# EAGLE board 12_SHR (EAGLE 7.5.0)
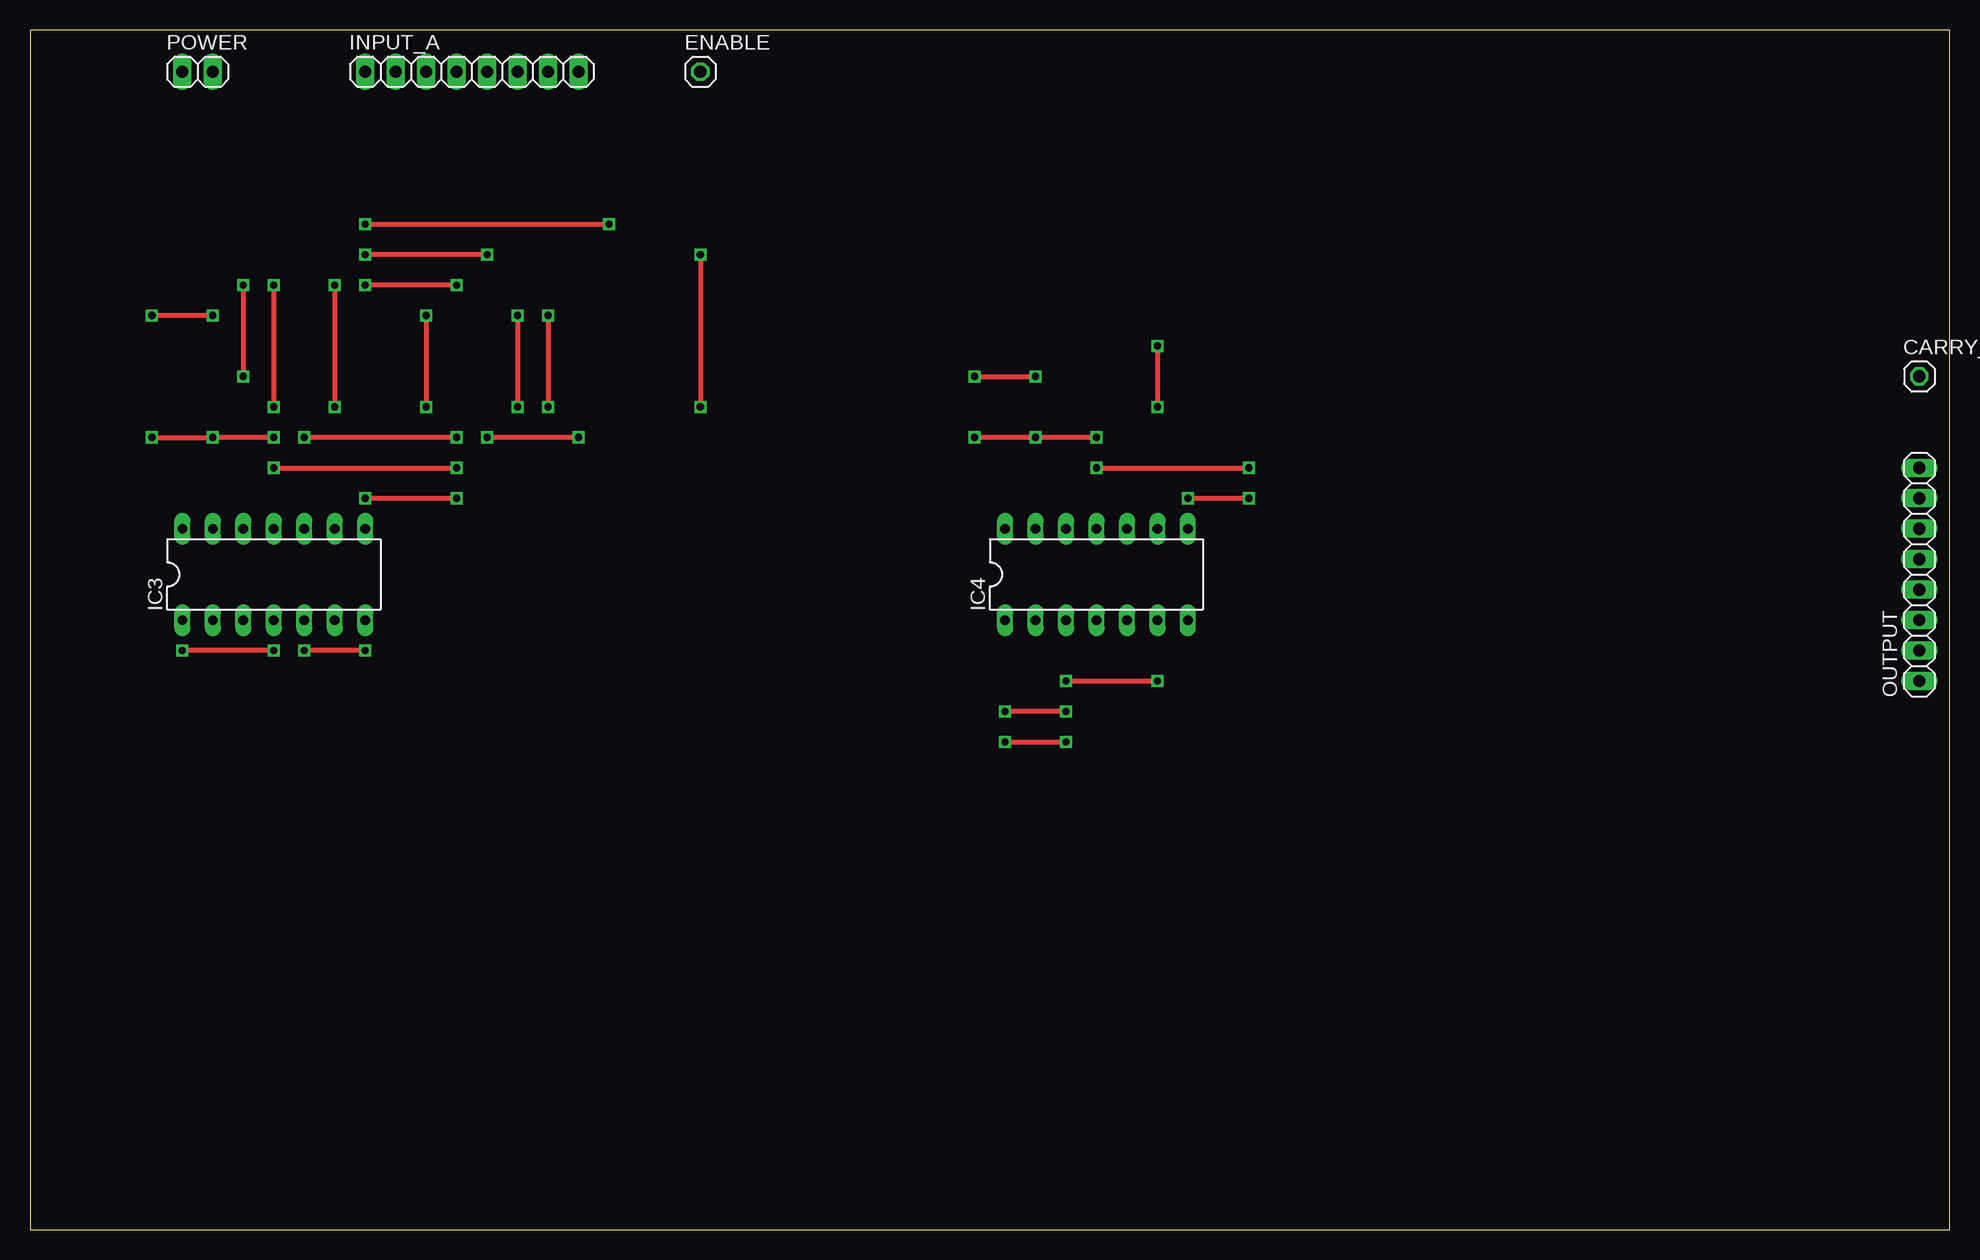
[diagram p0: board, top side]
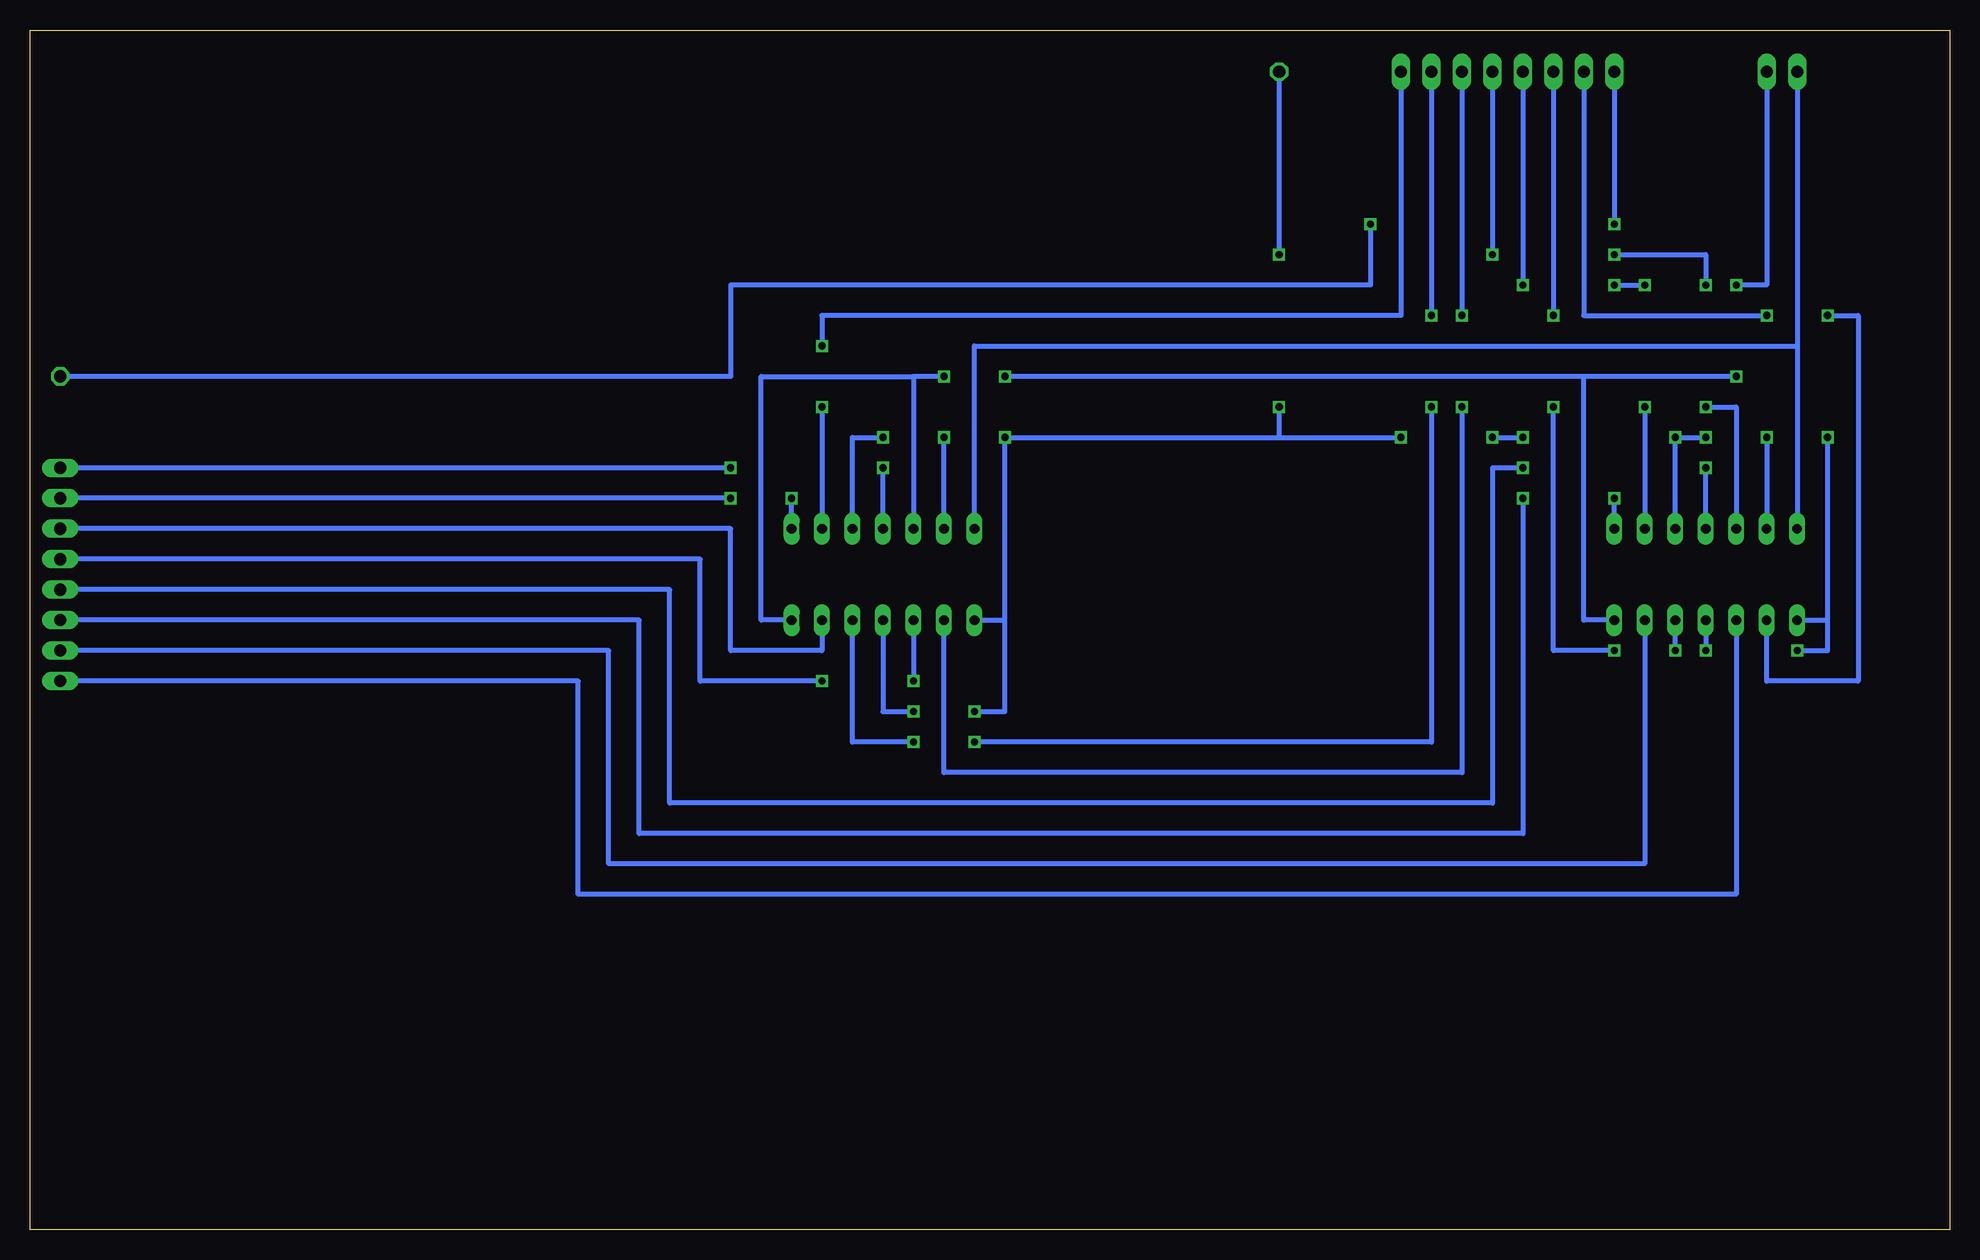
[diagram p1: board, bottom side, seen from below]

Size 160 x 100 mm. Coordinates in mm from the lower left corner, seen from the top.
Outline: 0,0 160,0 160,100 0,100 0,0
Copper layers (1*16): Top 0.035mm / dielectric 1.5mm / Bottom 0.035mm
Design rules "default": minimum track width 10mil, minimum drill 24mil, track to track 8mil, track to pad 8mil, pad to pad 8mil, via to via 8mil, smd to smd 8mil, copper to edge 40mil, drill to drill 8mil, minimum pad ring 10mil, minimum via ring 8mil, stop-mask expansion 4mil, vias tented up to drill 0mil, thermal gap 10mil

## Footprints (pad centres in the part's own frame; a part is rotated, then mirrored left to right if it is on the bottom)
1X01 = drill 1.016 octagon: 1 0,0
DIL14 = drill 0.813 long: 1 -7.62,-3.81; 2 -5.08,-3.81; 3 -2.54,-3.81; 4 0,-3.81; 5 2.54,-3.81; 6 5.08,-3.81; 7 7.62,-3.81; 8 7.62,3.81; 9 5.08,3.81; 10 2.54,3.81; 11 0,3.81; 12 -2.54,3.81; 13 -5.08,3.81; 14 -7.62,3.81
1X08 = drill 1.016 long: 1 -8.89,0; 2 -6.35,0; 3 -3.81,0; 4 -1.27,0; 5 1.27,0; 6 3.81,0; 7 6.35,0; 8 8.89,0
1X02 = drill 1.016 long: 1 -1.27,0; 2 1.27,0

## Placement (x,y rotation side)
CARRY_OUT  [1X01]  157.48,71.12 0 top
ENABLE  [1X01]  55.88,96.52 0 top
IC3  74LS126N  [DIL14]  20.32,54.61 0 top
IC4  74LS126N  [DIL14]  88.9,54.61 0 top
INPUT_A  [1X08]  36.83,96.52 0 top
OUTPUT  [1X08]  157.48,54.61 90 top
POWER  [1X02]  13.97,96.52 0 top

## Library data of the parts
CARRY_OUT ENABLE INPUT_A OUTPUT POWER = pinhead
IC3 IC4 = 74xx-eu

## Nets
GND: IC3.7 IC4.7 IC4.12 POWER.2
N$2: CARRY_OUT.1 INPUT_A.1
N$3: IC3.2 INPUT_A.2
N$6: IC3.12 INPUT_A.5
N$7: IC4.2 INPUT_A.6
N$8: IC4.5 INPUT_A.7
N$11: IC4.9 INPUT_A.8
N$20: IC3.5 INPUT_A.3
N$21: IC3.9 INPUT_A.4
N$25: IC3.3 OUTPUT.1
N$26: IC3.6 OUTPUT.2
N$27: IC3.8 OUTPUT.3
N$28: IC3.11 OUTPUT.4
N$29: IC4.3 OUTPUT.5
N$30: IC4.6 OUTPUT.6
N$31: IC4.8 OUTPUT.7
N$32: IC4.11 OUTPUT.8
N$33: ENABLE.1 IC3.1 IC3.4 IC3.10 IC3.13 IC4.1 IC4.4 IC4.10 IC4.13
VCC: IC3.14 IC4.14 POWER.1

## Tracks (layer width: path | path; a pad name or v marks a point on that pad's centre or on a via)
GND  (via drill 0.6)
  Top 0.406: v17.78,78.74 v17.78,71.12 | v78.74,71.12 v83.82,71.12
  Bottom 0.406: POWER.2 15.24,78.74 v17.78,78.74 | v17.78,71.12 30.48,71.12 | 30.48,71.12 v78.74,71.12 | v83.82,71.12 86.36,71.12 | 86.36,71.12 IC4.12 | IC4.7 99.06,50.8 99.06,71.12 86.36,71.12 | IC3.7 30.48,50.8 30.48,71.12
N$2  (via drill 0.6)
  Top 0.406: v27.94,83.82 v48.26,83.82
  Bottom 0.406: INPUT_A.1 v27.94,83.82 | CARRY_OUT.1 101.6,71.12 101.6,78.74 48.26,78.74 v48.26,83.82
N$3  (via drill 0.6)
  Top 0.406: v15.24,76.2 v10.16,76.2
  Bottom 0.406: INPUT_A.2 30.48,76.2 v15.24,76.2 | v10.16,76.2 7.62,76.2 7.62,45.72 15.24,45.72 IC3.2
N$6  (via drill 0.6)
  Top 0.406: v38.1,81.28 v27.94,81.28 | v20.32,78.74 v20.32,68.58
  Bottom 0.406: INPUT_A.5 v38.1,81.28 | v27.94,81.28 20.32,81.28 v20.32,78.74 | v20.32,68.58 17.78,68.58 IC3.12
N$7  (via drill 0.6)
  Top 0.406: v40.64,76.2 v40.64,68.58
  Bottom 0.406: INPUT_A.6 v40.64,76.2 | v40.64,68.58 40.64,38.1 83.82,38.1 IC4.2
N$8  (via drill 0.6)
  Top 0.406: v43.18,76.2 v43.18,68.58 | v81.28,40.64 v86.36,40.64
  Bottom 0.406: INPUT_A.7 v43.18,76.2 | v43.18,68.58 43.18,40.64 v81.28,40.64 | v86.36,40.64 91.44,40.64 IC4.5
N$11  (via drill 0.6)
  Top 0.406: v93.98,73.66 v93.98,68.58
  Bottom 0.406: INPUT_A.8 45.72,76.2 93.98,76.2 v93.98,73.66 | v93.98,68.58 IC4.9
N$20  (via drill 0.6)
  Top 0.406: v33.02,76.2 v33.02,68.58 | v27.94,48.26 v22.86,48.26
  Bottom 0.406: INPUT_A.3 v33.02,76.2 | v22.86,48.26 IC3.5 | v27.94,48.26 33.02,48.26 v33.02,68.58
N$21  (via drill 0.6)
  Top 0.406: v35.56,78.74 v27.94,78.74 | v25.4,78.74 v25.4,68.58
  Bottom 0.406: INPUT_A.4 v35.56,78.74 | v27.94,78.74 v25.4,78.74 | v25.4,68.58 IC3.9
N$25
  Bottom 0.406: IC3.3 17.78,27.94 114.3,27.94 114.3,45.72 OUTPUT.1
N$26
  Bottom 0.406: IC3.6 25.4,30.48 111.76,30.48 111.76,48.26 OUTPUT.2
N$27  (via drill 0.6)
  Top 0.406: v27.94,60.96 v35.56,60.96
  Bottom 0.406: IC3.8 v27.94,60.96 | v35.56,60.96 35.56,33.02 109.22,33.02 109.22,50.8 OUTPUT.3
N$28  (via drill 0.6)
  Top 0.406: v20.32,63.5 v35.56,63.5
  Bottom 0.406: IC3.11 v20.32,63.5 | v35.56,63.5 38.1,63.5 38.1,35.56 106.68,35.56 106.68,53.34 OUTPUT.4
N$29  (via drill 0.6)
  Top 0.406: v86.36,45.72 v93.98,45.72
  Bottom 0.406: IC4.3 v86.36,45.72 | v93.98,45.72 104.14,45.72 104.14,55.88 OUTPUT.5
N$30
  Bottom 0.406: IC4.6 93.98,48.26 101.6,48.26 101.6,58.42 OUTPUT.6
N$31  (via drill 0.6)
  Top 0.406: v96.52,60.96 v101.6,60.96
  Bottom 0.406: IC4.8 v96.52,60.96 | v101.6,60.96 OUTPUT.7
N$32  (via drill 0.6)
  Top 0.406: v88.9,63.5 v101.6,63.5
  Bottom 0.406: IC4.11 v88.9,63.5 | v101.6,63.5 OUTPUT.8
N$33  (via drill 0.6)
  Top 0.406: v55.88,81.28 v55.88,68.58 | v45.72,66.04 v38.1,66.04 | v35.56,66.04 v22.86,66.04 | v20.32,66.04 v15.24,66.04 v10.16,66.04 | v20.32,48.26 v12.7,48.26 | v78.74,66.04 v83.82,66.04 v88.9,66.04 | v86.36,43.18 v81.28,43.18
  Bottom 0.406: ENABLE.1 v55.88,81.28 | v55.88,68.58 55.88,66.04 | 55.88,66.04 v45.72,66.04 | v38.1,66.04 v35.56,66.04 | v20.32,66.04 v22.86,66.04 IC3.10 | v15.24,66.04 IC3.13 | IC3.1 10.16,50.8 | 10.16,50.8 v10.16,66.04 | IC3.4 v20.32,48.26 | v12.7,48.26 10.16,48.26 10.16,50.8 | IC4.13 v83.82,66.04 | 55.88,66.04 v78.74,66.04 78.74,50.8 | IC4.10 91.44,66.04 v88.9,66.04 | IC4.1 78.74,50.8 | IC4.4 88.9,43.18 v86.36,43.18 | v81.28,43.18 78.74,43.18 78.74,50.8
VCC
  Bottom 0.406: POWER.1 12.7,73.66 | 12.7,73.66 IC3.14 | IC4.14 81.28,73.66 12.7,73.66